# EAGLE board master_schematic (EAGLE 7.6.0)

Size 160 x 100 mm. Coordinates in mm from the lower left corner, seen from the top.
Outline: 0,0 160,0 160,100 0,100 0,0
Copper layers (1*16): Top 0.035mm / dielectric 1.5mm / Bottom 0.035mm
Design rules "default": minimum track width 10mil, minimum drill 24mil, track to track 8mil, track to pad 8mil, pad to pad 8mil, via to via 8mil, smd to smd 8mil, copper to edge 40mil, drill to drill 8mil, minimum pad ring 10mil, minimum via ring 8mil, stop-mask expansion 4mil, vias tented up to drill 0mil, thermal gap 10mil

## Footprints (pad centres in the part's own frame; a part is rotated, then mirrored left to right if it is on the bottom)
SOT23-DBV = smd 0.75 x 1.2: 1 -0.95,-1.3; 2 0,-1.3; 3 0.95,-1.3; 4 0.95,1.3; 5 -0.95,1.3
8-SOIC(SMT) = smd 0.6 x 1.55: EN -0.635,-2.7; GND -1.905,-2.7; IN1 0.635,-2.7; IN2 1.905,-2.7; NC -0.635,2.7; OUT1 1.905,2.7; OUT2 0.635,2.7; PG -1.905,2.7
JST-2-SMD = smd 1 x 4.6: 1 -1,-3.7; 2 1,-3.7 | smd 1.6 x 3.4: NC1 -3.4,1.5; NC2 3.4,1.5
B3F-10XX = drill 1.016 long: 1 -3.251,2.261; 2 3.251,2.261; 3 -3.251,-2.261; 4 3.251,-2.261
C0603 = smd 1.1 x 1: 1 -0.85,0; 2 0.85,0
C1206 = smd 1.6 x 1.8: 1 -1.4,0; 2 1.4,0
SOD123 = smd 1.4 x 1.4: A 1.9,0; C -1.9,0
SOIC-16 = smd 1.691 x 0.572: 1 -4.72,4.39; 2 -4.72,3.12; 3 -4.72,1.85; 4 -4.72,0.58; 5 -4.72,-0.69; 6 -4.72,-1.96; 7 -4.72,-3.23; 8 -4.72,-4.43; 9 4.72,-4.43; 10 4.72,-3.23; 11 4.72,-1.96; 12 4.72,-0.69; 13 4.72,0.58; 14 4.72,1.85; 15 4.72,3.12; 16 4.72,4.39
8-SOIC = smd 0.4 x 2.1: N1D/P1D -0.635,-1.95; N1G -1.905,-1.95; N2D/P2D 0.635,1.95; P1G -1.905,1.95; P1S/PS2 -0.635,1.95; P2G 1.905,1.95 | smd 0.42 x 2.1: N1S/N2S 0.635,-1.95; N2G 1.905,-1.95
L1812 = smd 1.9 x 3.4: 1 -1.95,0; 2 1.95,0
LED5MM = drill 0.813 octagon: A -1.27,0; K 1.27,0
2X03 = drill 1.016 octagon: 1 -2.54,-1.27; 2 -2.54,1.27; 3 0,-1.27; 4 0,1.27; 5 2.54,-1.27; 6 2.54,1.27
BP103 = drill 0.813 octagon: B 1.27,-1.27; C 1.016,1.016; E -1.016,-1.016
CHIPLED_0603 = smd 0.8 x 0.8: A 0,-0.75; C 0,0.75
CHIPLED_0805 = smd 1.2 x 1.2: A 0,-1.05; C 0,1.05
TC44278MSOP = smd 0.4 x 0.6: GND 0.635,-3; IN_A -0.635,-3; IN_B 1.905,-3; NC1 -1.905,-3; NC2 -1.905,3; OUT_A -0.635,3; OUT_B 1.905,3; VDD 0.635,3
2X04 = drill 1.016 octagon: 1 -3.81,-1.27; 2 -3.81,1.27; 3 -1.27,-1.27; 4 -1.27,1.27; 5 1.27,-1.27; 6 1.27,1.27; 7 3.81,-1.27; 8 3.81,1.27
R0603 = smd 1 x 1.1: 1 -0.85,0; 2 0.85,0
R1206 = smd 1.6 x 1.803: 1 -1.422,0; 2 1.422,0
M0805 = smd 1.3 x 1.6: 1 -0.95,0; 2 0.95,0
SMT-0540-S-R = smd 1 x 1: + 1.7,-2.7; - 1.7,2.7; M -1.7,-2.7
T212031 = drill 0.8 square: 1 0,2.54; 2 0,0; 3 0,-2.54
LQFP100 = smd 1.2 x 0.3: 1 -7.75,6; 2 -7.75,5.5; 3 -7.75,5; 4 -7.75,4.5; 5 -7.75,4; 6 -7.75,3.5; 7 -7.75,3; 8 -7.75,2.5; 9 -7.75,2; 10 -7.75,1.5; 11 -7.75,1; 12 -7.75,0.5; 13 -7.75,0; 14 -7.75,-0.5; 15 -7.75,-1; 16 -7.75,-1.5; 17 -7.75,-2; 18 -7.75,-2.5; 19 -7.75,-3; 20 -7.75,-3.5; 21 -7.75,-4; 22 -7.75,-4.5; 23 -7.75,-5; 24 -7.75,-5.5; 25 -7.75,-6; 51 7.75,-6; 52 7.75,-5.5; 53 7.75,-5; 54 7.75,-4.5; 55 7.75,-4; 56 7.75,-3.5; 57 7.75,-3; 58 7.75,-2.5; 59 7.75,-2; 60 7.75,-1.5; 61 7.75,-1; 62 7.75,-0.5; 63 7.75,0; 64 7.75,0.5; 65 7.75,1; 66 7.75,1.5; 67 7.75,2; 68 7.75,2.5; 69 7.75,3; 70 7.75,3.5; 71 7.75,4; 72 7.75,4.5; 73 7.75,5; 74 7.75,5.5; 75 7.75,6 | smd 0.3 x 1.2: 26 -6,-7.75; 27 -5.5,-7.75; 28 -5,-7.75; 29 -4.5,-7.75; 30 -4,-7.75; 31 -3.5,-7.75; 32 -3,-7.75; 33 -2.5,-7.75; 34 -2,-7.75; 35 -1.5,-7.75; 36 -1,-7.75; 37 -0.5,-7.75; 38 0,-7.75; 39 0.5,-7.75; 40 1,-7.75; 41 1.5,-7.75; 42 2,-7.75; 43 2.5,-7.75; 44 3,-7.75; 45 3.5,-7.75; 46 4,-7.75; 47 4.5,-7.75; 48 5,-7.75; 49 5.5,-7.75; 50 6,-7.75; 76 6,7.75; 77 5.5,7.75; 78 5,7.75; 79 4.5,7.75; 80 4,7.75; 81 3.5,7.75; 82 3,7.75; 83 2.5,7.75; 84 2,7.75; 85 1.5,7.75; 86 1,7.75; 87 0.5,7.75; 88 0,7.75; 89 -0.5,7.75; 90 -1,7.75; 91 -1.5,7.75; 92 -2,7.75; 93 -2.5,7.75; 94 -3,7.75; 95 -3.5,7.75; 96 -4,7.75; 97 -4.5,7.75; 98 -5,7.75; 99 -5.5,7.75; 100 -6,7.75
16-PINSOIC = smd 0.245 x 1: 1 -1.9,-2.2; 2 -1.35,-2.22; 3 -0.8,-2.2; 4 -0.25,-2.2; 5 0.3,-2.2; 6 0.85,-2.2; 7 1.4,-2.2; 8 1.95,-2.2; 9 1.95,2.2; 10 1.4,2.2; 11 0.85,2.2; 12 0.3,2.2; 13 -0.25,2.2; 14 -0.8,2.2; 15 -1.35,2.2; 16 -1.9,2.2

## Placement (x,y rotation side)
33LDO  TPS73633DBVR  [SOT23-DBV]  54.61,48.26 0 top
50LDO  TPS76850QD  [8-SOIC(SMT)]  63.5,24.13 0 top
BAT_1  JST_2mm  [JST-2-SMD]  88.9,15.24 270 top
BAT_2  JST_2mm  [JST-2-SMD]  74.93,15.24 90 top
BOOT0  A_HIGH  [B3F-10XX]  99.06,34.29 90 top
C1  100nF  [C0603]  27.94,8.89 0 top
C1_3.3V  10uF  [C0603]  -29.21,80.01 0 top  (outside the outline)
C1_5V  100uF  [C0603]  -41.91,90.17 0 top  (outside the outline)
C1_A  1uF  [C0603]  85.09,60.96 0 top
C1_BAT  4.7uF  [C0603]  -54.61,80.01 0 top  (outside the outline)
C1_F_EMITS  4.7uF  [C1206]  97.79,88.9 0 top
C1_L_EMIT  4.7uF  [C1206]  55.88,68.58 0 top
C1_LMOT  100uF  [C0603]  -20.32,74.93 0 top  (outside the outline)
C1_R_EMIT  4.7uF  [C1206]  130.81,64.77 0 top
C1_RMOT  100uF  [C0603]  -52.07,69.85 0 top  (outside the outline)
C2  1uF  [C0603]  40.64,8.89 0 top
C2_3.3V  .1uF  [C0603]  -38.1,80.01 0 top  (outside the outline)
C2_5V  .1uF  [C0603]  -49.53,90.17 0 top  (outside the outline)
C2_A  100nF  [C0603]  -55.88,90.17 0 top  (outside the outline)
C2_F_EMITS  .1uF  [C1206]  91.44,88.9 0 top
C2_L_EMIT  .1uF  [C1206]  52.07,59.69 0 top
C2_LMOT  .1uF  [C0603]  -30.48,74.93 0 top  (outside the outline)
C2_R_EMIT  .1 uF  [C1206]  129.54,58.42 0 top
C2_RMOT  .1uF  [C0603]  -62.23,69.85 0 top  (outside the outline)
C3_3.3V  100nF  [C0603]  -46.99,80.01 0 top  (outside the outline)
C4  1uF  [C0603]  13.97,31.75 0 top
C5  1uF  [C0603]  123.19,11.43 0 top
C_1  100nF  [C0603]  -62.23,90.17 0 top  (outside the outline)
C_2  100nF  [C0603]  -68.58,90.17 0 top  (outside the outline)
C_3  100nF  [C0603]  -74.93,90.17 0 top  (outside the outline)
C_4  100nF  [C0603]  -81.28,90.17 0 top  (outside the outline)
C_5  100nF  [C0603]  96.52,50.8 90 top
C_L_L1  0.1uF  [C0603]  -72.39,85.09 0 top  (outside the outline)
C_L_R1  0.1 uF  [C0603]  -64.77,85.09 0 top  (outside the outline)
C_RESET1  0.1 uF  [C0603]  77.47,34.29 90 top
C_RESET3  0.1 uF  [C0603]  -21.59,69.85 0 top  (outside the outline)
C_US_1  0.1 uF  [C0603]  -62.23,80.01 0 top  (outside the outline)
C_VBAT1  .1uF  [C0603]  67.31,13.97 90 top
C_VBAT2  100uF  [C0603]  62.23,12.7 90 top
C_VCAP3  2.2uF  [C0603]  134.62,16.51 0 top
C_VCAP4  2.2uF  [C0603]  130.81,35.56 0 top
D1  >24V  [SOD123]  118.11,19.05 0 top
D2  25V  [SOD123]  133.35,22.86 0 top
G1  ADXRS810  [SOIC-16]  105.41,50.8 0 top
HB_L  ZXMHC3F381N8TC  [8-SOIC]  107.95,66.04 0 top
HB_R  ZXMHC3F381N8TC  [8-SOIC]  71.12,74.93 0 top
L1  470uH  [L1812]  104.14,43.18 0 top
L_3.3V  10uH  [L1812]  95.25,22.86 180 top
L_5.0V  10uH  [L1812]  71.12,24.13 0 top
L_IR_EMIT  5mm  [LED5MM]  52.07,74.93 0 top
L_MOT  L1  [2X03]  78.74,68.58 0 top
L_REC1  BP103  [BP103]  44.45,66.04 0 top
LED1  0805  [CHIPLED_0603]  -33.02,62.23 0 top  (outside the outline)
LED2  0805  [CHIPLED_0603]  -36.83,62.23 0 top  (outside the outline)
LED3  0805  [CHIPLED_0603]  62.23,80.01 0 top
LED4  0805  [CHIPLED_0603]  -44.45,62.23 0 top  (outside the outline)
LED5  0805  [CHIPLED_0603]  -48.26,62.23 0 top  (outside the outline)
LED6  0805  [CHIPLED_0603]  -52.07,62.23 0 top  (outside the outline)
LED7  0805  [CHIPLED_0603]  -55.88,62.23 0 top  (outside the outline)
LED8  0805  [CHIPLED_0603]  -59.69,62.23 0 top  (outside the outline)
LED9  0805  [CHIPLED_0603]  83.82,86.36 0 top
LED10  PWR_LED  [CHIPLED_0805]  86.36,5.08 90 top
LF_IR_EMIT  5mm  [LED5MM]  64.77,83.82 0 top
LF_REC1  BP103  [BP103]  74.93,90.17 0 top
MOS_L  TC44278MSOP  [TC44278MSOP]  99.06,66.04 0 top
MOS_R  TC44278MSOP  [TC44278MSOP]  67.31,66.04 0 top
PROG_HEAD  2x4  [2X04]  85.09,34.29 0 top
R1_LMOT  47k  [R0603]  -72.39,69.85 0 top  (outside the outline)
R1_RMOT  47k  [R0603]  -31.75,69.85 0 top  (outside the outline)
R2_LMOT  47k  [R0603]  -82.55,69.85 0 top  (outside the outline)
R2_RMOT  47k  [R0603]  16.51,39.37 0 top
R_BT0_1  47k  [R0603]  -20.32,80.01 0 top  (outside the outline)
R_IR_EMIT  5mm  [LED5MM]  132.08,73.66 0 top
R_L_R1  1.8k ohm  [R0603]  -48.26,74.93 0 top  (outside the outline)
R_LED1  1k  [R0603]  -69.85,80.01 0 top  (outside the outline)
R_LED2  1k  [R0603]  -77.47,80.01 0 top  (outside the outline)
R_LED3  1k  [R0603]  -85.09,80.01 0 top  (outside the outline)
R_LED4  1k  [R0603]  -19.05,85.09 0 top  (outside the outline)
R_LED5  1k  [R0603]  -26.67,85.09 0 top  (outside the outline)
R_LED6  1k  [R0603]  -34.29,85.09 0 top  (outside the outline)
R_LED7  1k  [R0603]  -41.91,85.09 0 top  (outside the outline)
R_LED8  1k  [R0603]  -49.53,85.09 0 top  (outside the outline)
R_LED9  1k  [R0603]  -57.15,85.09 0 top  (outside the outline)
R_LEFT  6 ohm  [R1206]  63.5,73.66 0 top
R_LF  10 ohm  [R1206]  78.74,83.82 0 top
R_LF_R1  1.8k ohm  [R0603]  -39.37,74.93 0 top  (outside the outline)
R_MOT  R1  [2X03]  88.9,68.58 180 top
R_PWR  200 Ohm  [M0805]  73.66,5.08 0 top
R_R_R1  1.8k ohm  [R0603]  -66.04,74.93 0 top  (outside the outline)
R_REC1  BP103  [BP103]  138.43,62.23 0 top
R_RF  10 ohm  [R1206]  113.03,83.82 0 top
R_RF_R1  1.8k ohm  [R0603]  -57.15,74.93 0 top  (outside the outline)
R_RIGHT  6 ohm  [R1206]  124.46,69.85 0 top
R_RST_UP1  47k  [R0603]  71.12,40.64 0 top
R_SW1  47k  [R0603]  -80.01,85.09 0 top  (outside the outline)
R_SW2  47k  [R0603]  -19.05,90.17 0 top  (outside the outline)
RF_IR_EMIT  5mm  [LED5MM]  120.65,82.55 0 top
RF_REC1  BP103  [BP103]  113.03,90.17 0 top
RST  A_LOW  [B3F-10XX]  71.12,34.29 270 top
S2  A_LOW  [B3F-10XX]  109.22,34.29 90 top
S3  A_LOW  [B3F-10XX]  60.96,34.29 90 top
SPK1  SMT-0540-S-R  [SMT-0540-S-R]  142.24,43.18 0 top
U$2  T212031  [T212031]  97.79,3.81 270 top
U$3  STM32F769VG-1  [LQFP100]  85.09,49.53 0 top
U$4  ULN2003APWR  [16-PINSOIC]  92.71,78.74 0 top

## Library data of the parts
33LDO = TPSRegulators; AVAILABILITY: Good; DESCRIPTION: Single Output LDO, 400mA, Adj.(1.2 to 5.5V), Cap free, Low Noise, Reverse Current Protection 5-SOT-23 -40 to 125; MF: Texas Instruments; MP: TPS73633DBVR; PACKAGE: SOT-23 Texas Instruments; PRICE: 1.34 USD
50LDO = TPSRegulators
BAT_1 BAT_2 = SparkFun-Connectors; BTM_NEG: -; BTM_POS: +; PROD_ID: CONN-11443; TOP_NEG: -; TOP_POS: +
BOOT0 RST S2 S3 = switch-omron; MPN: B3F-1000; OC_FARNELL: 176432; OC_NEWARK: 36M3542
C1 C1_A C1_BAT C1_LMOT C1_RMOT C2 C2_A C2_LMOT C2_RMOT C4 C5 C_1-C_5 C_VCAP3 C_VCAP4 = rcl
C1_3.3V C1_5V C1_F_EMITS C1_L_EMIT C1_R_EMIT C2_3.3V C2_5V C2_F_EMITS C2_L_EMIT C2_R_EMIT C3_3.3V C_L_L1 C_L_R1 C_RESET1 C_RESET3 C_US_1 C_VBAT1 C_VBAT2 L1 L_3.3V L_5.0V R1_LMOT R1_RMOT R2_LMOT R2_RMOT R_BT0_1 R_L_R1 R_LED1-R_LED9 R_LEFT R_LF R_LF_R1 R_PWR R_R_R1 R_RF R_RF_R1 R_RIGHT R_RST_UP1 R_SW1 R_SW2 = resistor
D1 D2 = diode
G1 = gyroscope
HB_L HB_R = MMHbridge
L_IR_EMIT LED1-LED10 LF_IR_EMIT R_IR_EMIT RF_IR_EMIT = led
L_MOT PROG_HEAD R_MOT = pinhead
L_REC1 LF_REC1 R_REC1 RF_REC1 = opto-trans-siemens; OC_FARNELL: unknown; OC_NEWARK: unknown
MOS_L MOS_R = MMmosfet
SPK1 = SMT-0540-S-R; AVAILABILITY: Good; DESCRIPTION: Audio Indicator Transducer Electromagnetic 3Vp-p 100mA Solder Pad 2Vp-p 3500Hz to 4500Hz Surface Mount; MF: PUI Audio; MP: SMT-0540-S-R; PACKAGE: None; PRICE: 2.42 USD
U$2 = GCswitch
U$3 = MCU
U$4 = MMULN

## Nets
3.3V: 33LDO.5 BOOT0.3 C1_3.3V.1 C1_BAT.1 C2_3.3V.1 C_1.1 C_2.1 C_3.1 C_4.1 C_5.1 D2.C L_3.3V.1 PROG_HEAD.1 R_RST_UP1.2 R_SW1.2 R_SW2.2 SPK1.- U$3.6 U$3.11 U$3.27 U$3.50 U$3.75 U$3.100
5V: 33LDO.1 33LDO.3 50LDO.OUT1 50LDO.OUT2 C1_5V.1 C1_F_EMITS.2 C1_L_EMIT.2 C1_R_EMIT.2 C2_5V.1 C2_F_EMITS.2 C2_L_EMIT.2 C2_R_EMIT.2 L_5.0V.2 L_IR_EMIT.A LF_IR_EMIT.A R_IR_EMIT.A R_PWR.2 RF_IR_EMIT.A
A3.3V: C1_A.1 C2_A.1 C4.1 C_L_L1.1 C_L_R1.1 G1.6 L1.1 L_3.3V.2 L_REC1.C LF_REC1.C R_REC1.C RF_REC1.C U$3.20 U$3.21
A5.0V: L_5.0V.1 L_MOT.3 R_MOT.3
BOOT0: BOOT0.1 R_BT0_1.2 U$3.94
BUZZER: U$3.59 U$4.1
C_US_2: C_RESET3.1 R_SW2.1 S2.1
G_CS: G1.4 U$3.28
G_MISO: G1.5 U$3.30
G_MOSI: G1.15 U$3.31
G_SCLK: G1.16 U$3.29
GND: 33LDO.2 50LDO.EN 50LDO.GND BAT_2.1 C1.2 C1_3.3V.2 C1_5V.2 C1_A.2 C1_BAT.2 C1_F_EMITS.1 C1_L_EMIT.1 C1_R_EMIT.1 C2.2 C2_3.3V.2 C2_5V.2 C2_A.2 C2_F_EMITS.1 C2_L_EMIT.1 C2_R_EMIT.1 C3_3.3V.2 C4.2 C5.2 C_1.2 C_2.2 C_3.2 C_4.2 C_5.2 C_L_L1.2 C_L_R1.2 C_RESET1.2 C_RESET3.2 C_US_1.2 C_VBAT1.2 C_VBAT2.2 C_VCAP3.2 C_VCAP4.2 G1.2 G1.3 G1.7 G1.10 G1.11 G1.12 G1.13 LED1.C LED2.C LED3.C LED4.C LED5.C LED6.C LED7.C LED8.C LED9.C LED10.C PROG_HEAD.3 R_BT0_1.1 R_L_R1.1 R_LF_R1.1 R_R_R1.1 R_RF_R1.1 RST.3 S2.3 S3.3 U$3.10 U$3.19 U$3.26 U$3.49 U$3.74 U$3.99 U$4.8
GND1: C1_LMOT.1 C1_RMOT.1 C2_LMOT.1 C2_RMOT.1 HB_L.N1S/N2S HB_R.N1S/N2S L_MOT.4 MOS_L.GND MOS_R.GND R1_LMOT.1 R1_RMOT.1 R2_LMOT.1 R2_RMOT.1 R_MOT.4
L_EMITTER: U$3.91 U$4.5 U$4.6
L_ENC_A: L_MOT.1 U$3.41
L_ENC_B: L_MOT.2 U$3.39
LED1: R_LED1.2 U$3.51
LED2: R_LED2.2 U$3.52
LED3: R_LED3.2 U$3.53
LED4: R_LED4.2 U$3.17
LED5: R_LED5.2 U$3.16
LED6: R_LED6.2 U$3.85
LED7: R_LED7.2 U$3.84
LED8: R_LED8.2 U$3.83
LED9: R_LED9.2 U$3.82
LED10: U$3.46
LEFT_REC: LF_REC1.E R_LF_R1.2 U$3.32
LF_EMITTER: U$3.90 U$4.7
LF_REC: L_REC1.E R_L_R1.2 U$3.33
LPWMA: MOS_L.IN_A R1_LMOT.2 U$3.24
LPWMB: MOS_L.IN_B R2_LMOT.2 U$3.25
N$1: LED10.A R_PWR.1
N$2: 33LDO.4 C3_3.3V.1
N$5: HB_L.N1G MOS_L.OUT_A
N$6: HB_L.N2G HB_L.P2G MOS_L.OUT_B
N$8: HB_L.N1D/P1D L_MOT.5
N$9: BAT_1.1 BAT_2.2
N$10: C5.1 G1.1
N$11: HB_L.N2D/P2D L_MOT.6
N$14: D1.A G1.8 L1.2
N$17: HB_R.N1G MOS_R.OUT_A
N$18: HB_R.N2G HB_R.P2G MOS_R.OUT_B
N$19: HB_R.N1D/P1D R_MOT.5
N$20: C1.1 D1.C G1.9
N$21: HB_R.N2D/P2D R_MOT.6
N$22: R_RF.1 U$4.15
N$23: R_RF.2 RF_IR_EMIT.K
N$24: R_RIGHT.1 U$4.13 U$4.14
N$25: R_IR_EMIT.K R_RIGHT.2
N$26: L_IR_EMIT.K R_LEFT.2
N$27: R_LEFT.1 U$4.11 U$4.12
N$28: LF_IR_EMIT.K R_LF.2
N$29: D2.A SPK1.+ U$4.16
N$30: R_LF.1 U$4.10
N$31: BAT_1.2 U$2.2
N$33: PROG_HEAD.8
N$34: PROG_HEAD.6
N$35: C2.1 G1.14
N$40: LED1.A R_LED1.1
N$41: LED2.A R_LED2.1
N$42: LED3.A R_LED3.1
N$43: LED4.A R_LED4.1
N$44: LED5.A R_LED5.1
N$45: LED6.A R_LED6.1
N$46: LED7.A R_LED7.1
N$47: LED8.A R_LED8.1
N$48: LED9.A R_LED9.1
N$56: C_VCAP4.1 U$3.73
N$57: C_VCAP3.1 U$3.48
R_EMITTER: U$3.65 U$4.3 U$4.4
R_ENC_A: R_MOT.1 U$3.44
R_ENC_B: R_MOT.2 U$3.43
RESET: C_RESET1.1 R_RST_UP1.1 RST.1 U$3.14
RF_EMITTER: U$3.66 U$4.2
RF_REC: R_R_R1.2 R_REC1.E U$3.34
RIGHT_REC: R_RF_R1.2 RF_REC1.E U$3.35
RPWMA: MOS_R.IN_A R1_RMOT.2 U$3.22
RPWMB: MOS_R.IN_B R2_RMOT.2 U$3.23
RX: PROG_HEAD.5 U$3.69
SW1: U$3.63
SW2: U$3.62
SW3: U$3.61
SW4: U$3.60
SWCLK: PROG_HEAD.4 U$3.76
SWDIO: PROG_HEAD.2 U$3.72
TX: PROG_HEAD.7 U$3.68
US_1: C_US_1.1 R_SW1.1 S3.1
V_BAT: 50LDO.IN1 50LDO.IN2 C1_LMOT.2 C1_RMOT.2 C2_LMOT.2 C2_RMOT.2 C_VBAT1.1 C_VBAT2.1 HB_L.P1S/PS2 HB_R.P1S/PS2 MOS_L.VDD MOS_R.VDD U$2.3
VOLTMETER: U$3.15

## Tracks (layer width: path | path; a pad name or v marks a point on that pad's centre or on a via)
3.3V  (22 unrouted)
5V  (17 unrouted)
A3.3V  (13 unrouted)
A5.0V  (2 unrouted)
BOOT0  (2 unrouted)
BUZZER  (1 unrouted)
C_US_2  (2 unrouted)
G_CS  (1 unrouted)
G_MISO  (1 unrouted)
G_MOSI  (1 unrouted)
G_SCLK  (1 unrouted)
GND  (68 unrouted)
GND1  (13 unrouted)
L_EMITTER  (2 unrouted)
L_ENC_A  (1 unrouted)
L_ENC_B  (1 unrouted)
LED1  (1 unrouted)
LED2  (1 unrouted)
LED3  (1 unrouted)
LED4  (1 unrouted)
LED5  (1 unrouted)
LED6  (1 unrouted)
LED7  (1 unrouted)
LED8  (1 unrouted)
LED9  (1 unrouted)
LEFT_REC  (2 unrouted)
LF_EMITTER  (1 unrouted)
LF_REC  (2 unrouted)
LPWMA  (2 unrouted)
LPWMB  (2 unrouted)
N$1  (1 unrouted)
N$2  (1 unrouted)
N$5  (1 unrouted)
N$6  (2 unrouted)
N$8  (1 unrouted)
N$9  (1 unrouted)
N$10  (1 unrouted)
N$11  (1 unrouted)
N$14  (2 unrouted)
N$17  (1 unrouted)
N$18  (2 unrouted)
N$19  (1 unrouted)
N$20  (2 unrouted)
N$21  (1 unrouted)
N$22  (1 unrouted)
N$23  (1 unrouted)
N$24  (2 unrouted)
N$25  (1 unrouted)
N$26  (1 unrouted)
N$27  (2 unrouted)
N$28  (1 unrouted)
N$29  (2 unrouted)
N$30  (1 unrouted)
N$31  (1 unrouted)
N$35  (1 unrouted)
N$40  (1 unrouted)
N$41  (1 unrouted)
N$42  (1 unrouted)
N$43  (1 unrouted)
N$44  (1 unrouted)
N$45  (1 unrouted)
N$46  (1 unrouted)
N$47  (1 unrouted)
N$48  (1 unrouted)
N$56  (1 unrouted)
N$57  (1 unrouted)
R_EMITTER  (2 unrouted)
R_ENC_A  (1 unrouted)
R_ENC_B  (1 unrouted)
RESET  (3 unrouted)
RF_EMITTER  (1 unrouted)
RF_REC  (2 unrouted)
RIGHT_REC  (2 unrouted)
RPWMA  (2 unrouted)
RPWMB  (2 unrouted)
RX  (1 unrouted)
SWCLK  (1 unrouted)
SWDIO  (1 unrouted)
TX  (1 unrouted)
US_1  (2 unrouted)
V_BAT  (12 unrouted)